# Altium PCB PCB1.PcbDoc
Units mil, origin at the board's own origin, x right, y up, seen from the top; angles counter-clockwise.
Board outline 4000 x 4000 mil, 2 copper layers (Top Layer, Bottom Layer); 49 components, 31 nets, 140 pads, 0 vias.
Unrouted connection lines stored in the file: 37.
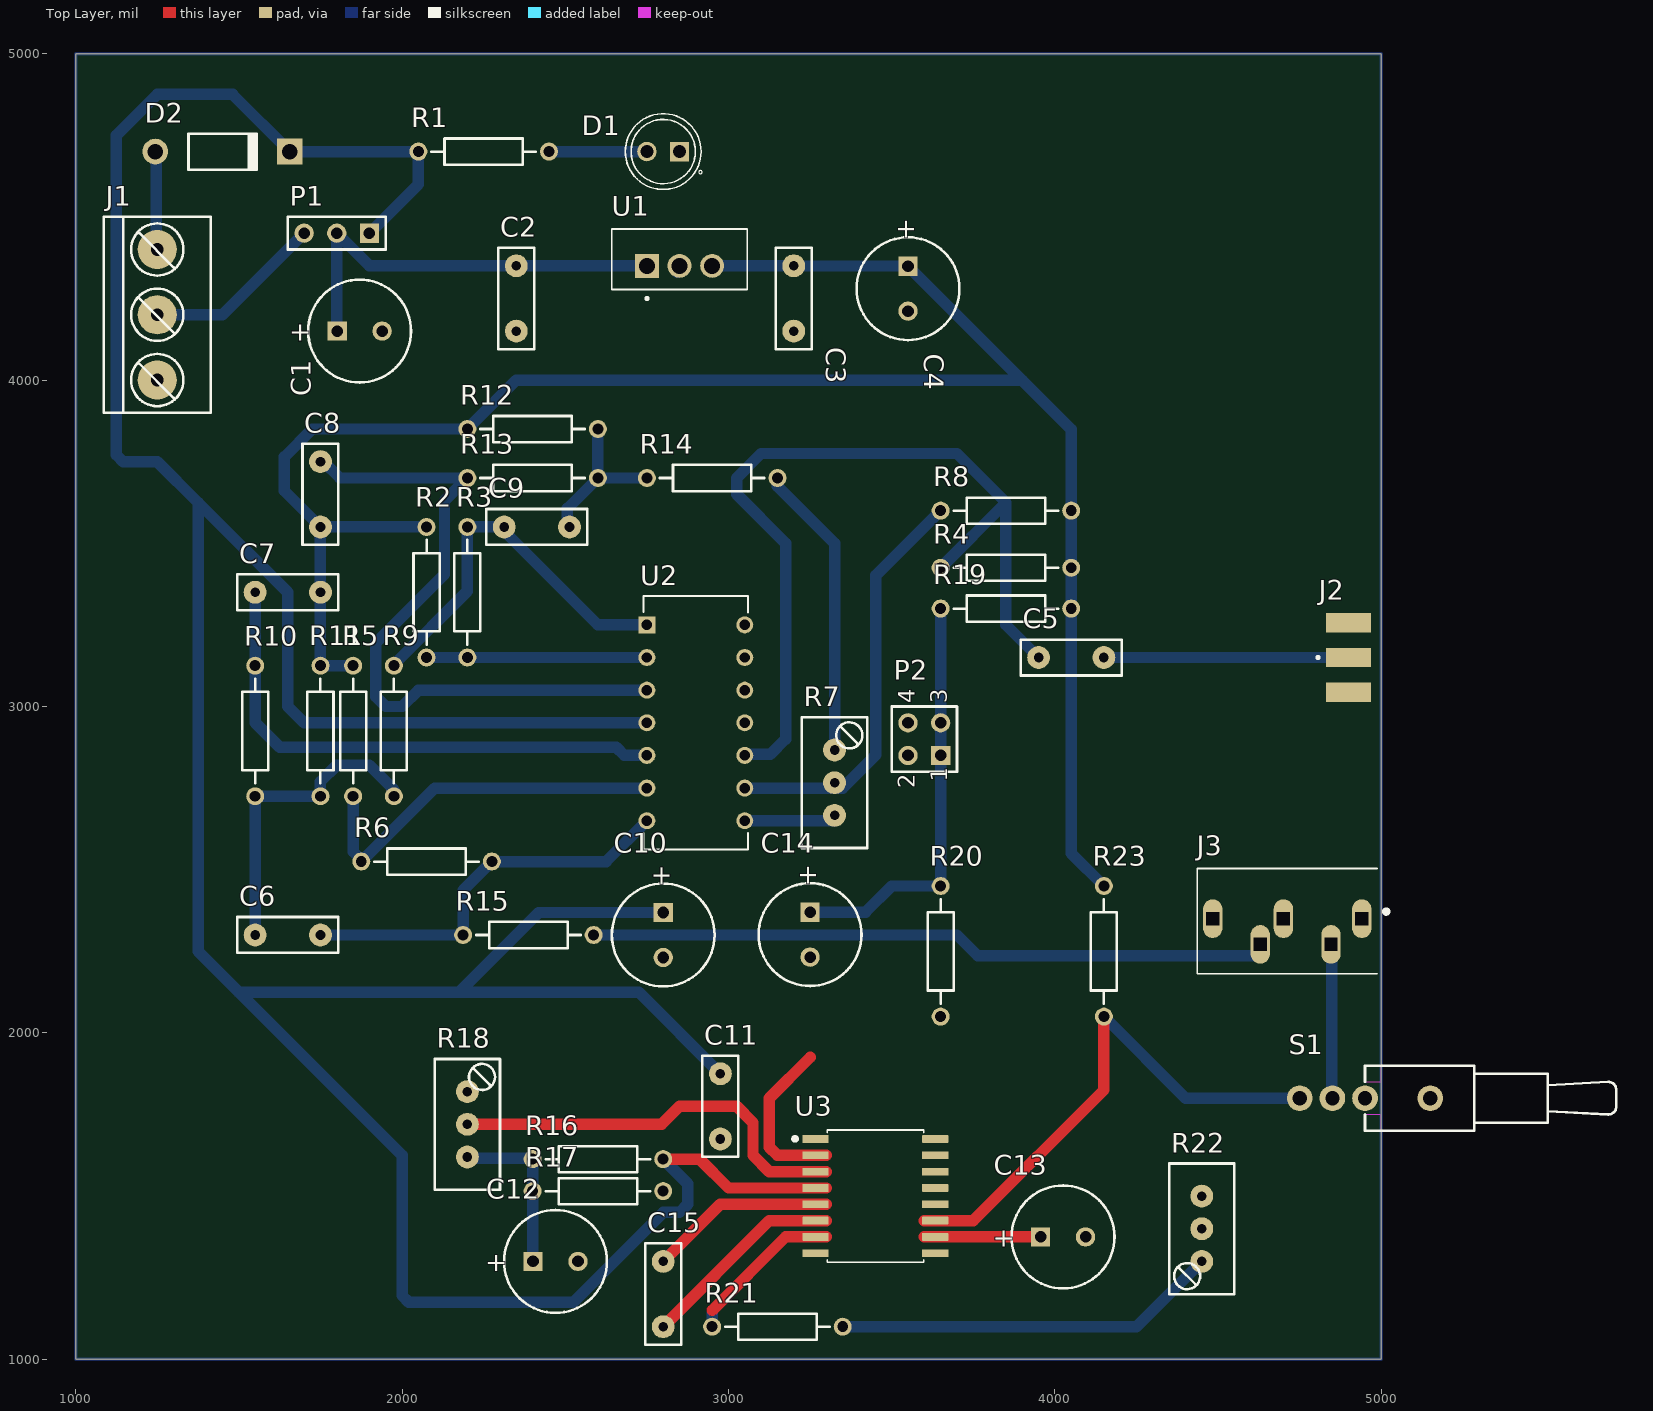
[diagram p0: Top Layer view]
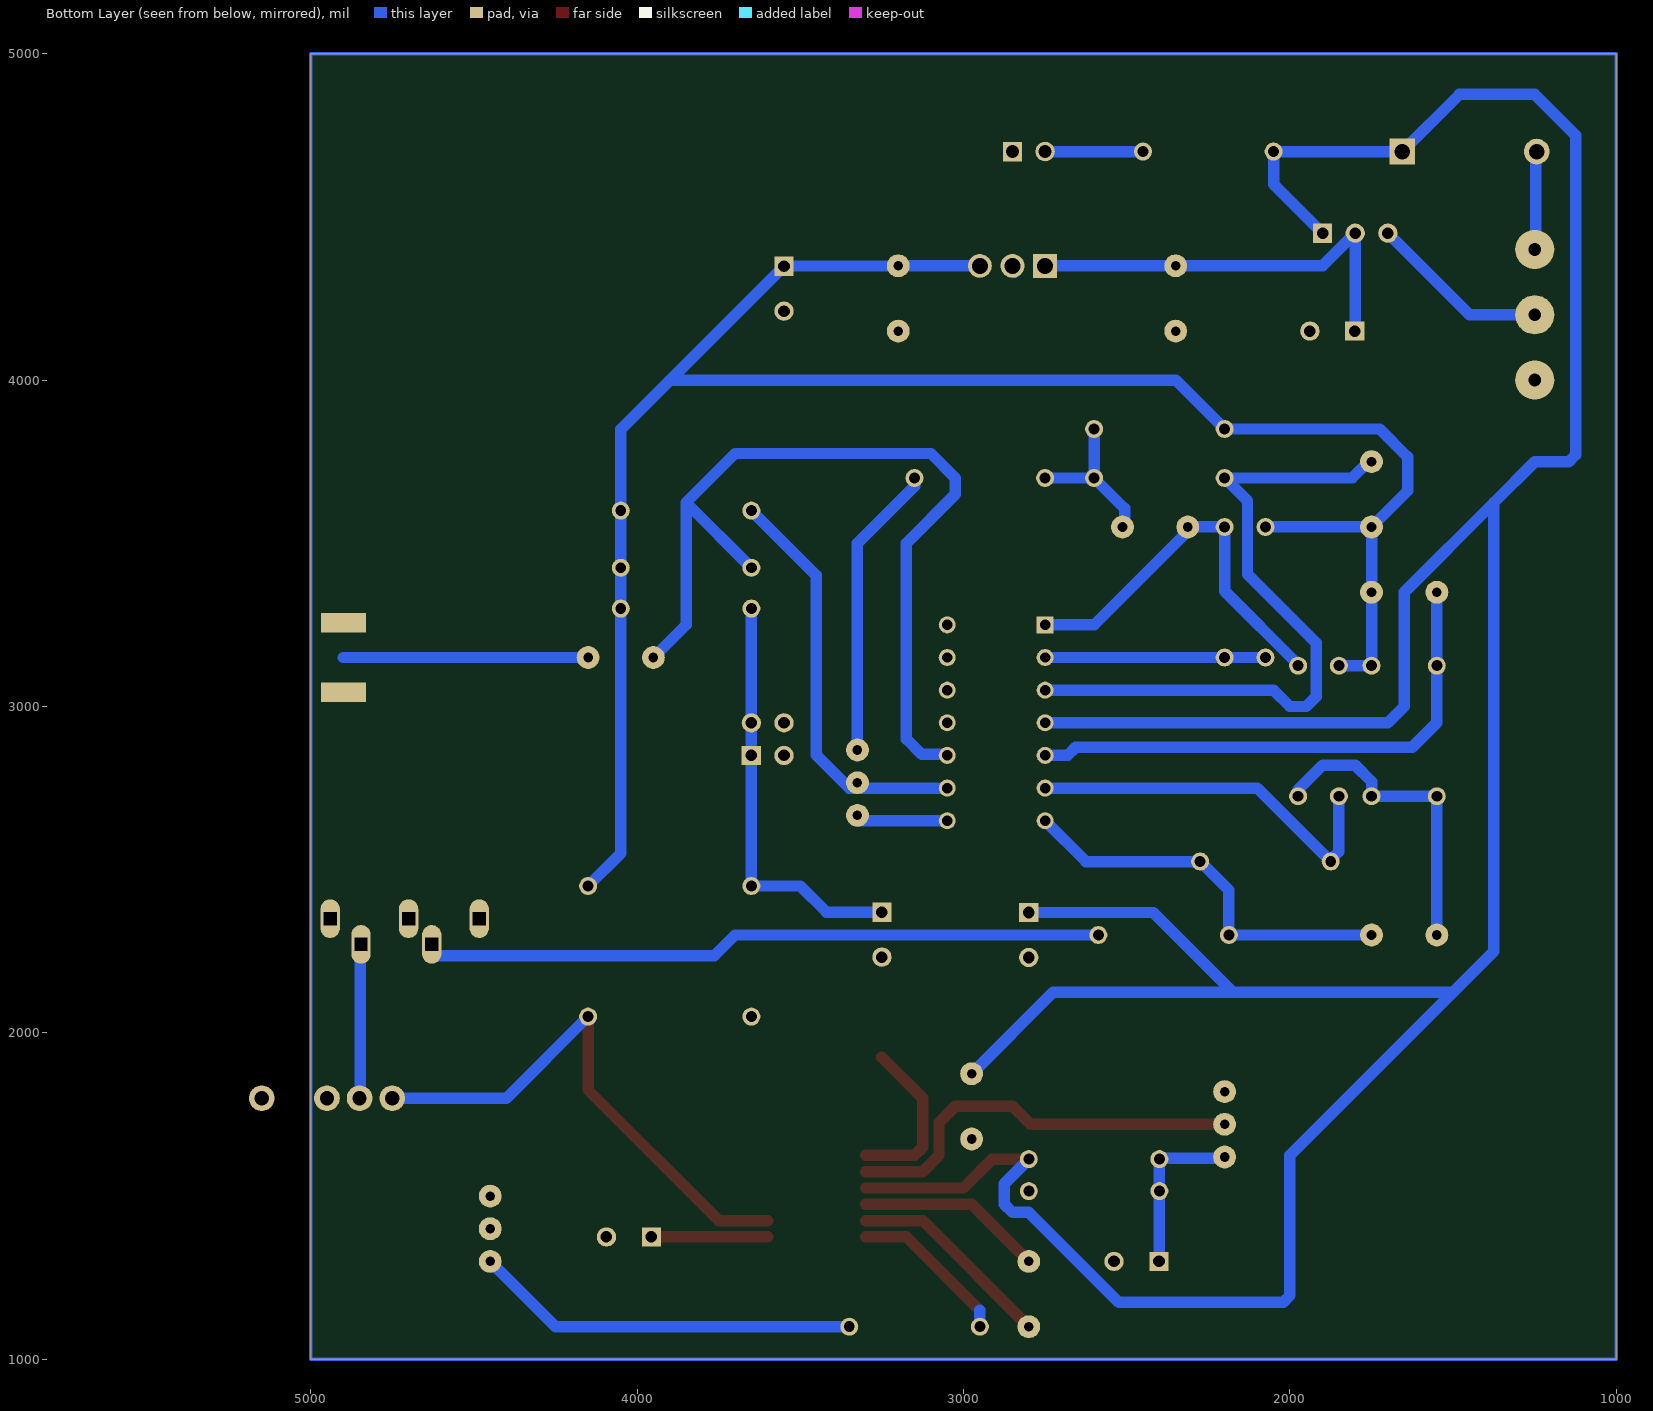
[diagram p1: Bottom Layer view, seen from below]

## Layer stack, top to bottom
Top Solder: solder mask 0.4, Solder Resist, Dk 3.5
Top Layer: signal copper 1.4
Dielectric 1: dielectric 12.6, FR-4, Dk 4.8
Bottom Layer: signal copper 1.4
Bottom Solder: solder mask 0.4, Solder Resist, Dk 3.5

## Board outline
1000,1000 5000,1000 5000,5000 1000,5000

## Design rules (kind name [scope] priority, off if disabled: settings)
Clearance [All] p1: gap=10 ignorepadtopadclearanceinfootprint=FALSE except(0: Arc-Hole Track-Hole SMDPad-Hole THPad-Hole Via-Hole Fill-Hole Poly-Hole Region-Hole Text-Hole)
PolygonConnect [All] p1: connectstyle=Relief reliefconductorwidth=10 reliefentries=4 polygonreliefangle="90 Angle" airgapwidth=10
RoutingVias [All] p1: holewidth=28 width=50 viastyle="Through Hole" minholewidth=28 minwidth=50 maxholewidth=28 maxwidth=50
SolderMaskExpansion [All] p1: expansion=4
UnRoutedNet [All] p1: checkbadconnections=TRUE
Width [All] p1: maxlimit=50 minlimit=20 preferedwidth=35
29 further rules are at their usual default settings.

## Components (designator, comment, footprint, x,y, rotation, side; value= is the part's Value field where it differs from the comment)
C1 "Cap2" CAPPR3.5-8x11.5 1870,4150 r0 top value=10uF
C2 "Cap" RAD-0.2 2350,4350 r270 top value=100nF
C3 "Cap" RAD-0.2 3200,4350 r270 top value=10nF
C4 "Cap2" CAPPR3.5-8x11.5 3550,4280 r270 top value=1uF
C5 "Cap" RAD-0.2 3950,3150 r0 top value=1uF
C6 "Cap" RAD-0.2 1750,2300 r180 top value=1nF
C7 "Cap" RAD-0.2 1550,3350 r0 top value=1nF
C8 "Cap" RAD-0.2 1750,3550 r90 top value=1nF
C9 "Cap" RAD-0.2 2512.88,3550 r180 top value=1nF
C10 "Cap2" CAPPR3.5-8x11.5 2800,2300 r270 top value=100uF
C11 "Cap" RAD-0.2 2975,1875 r270 top value=0.1uF
C12 "Cap2" CAPPR3.5-8x11.5 2470,1300 r0 top value=10uF
C13 "Cap2" CAPPR3.5-8x11.5 4025,1375 r0 top value=1uF
C14 "Cap2" CAPPR3.5-8x11.5 3250,2301.1 r270 top value=10uF
C15 "Cap" RAD-0.2 2800,1300 r270 top value=0.47uF
D1 "WP7113SEC" LED_WP7113SEC 2800,4700 r180 top
D2 "1N4001" DO-41 1450,4700 r0 top
J1 "Borne x 3" BORNE-3x0.2 1250,4200 r270 top
J2 "SMA" RFSOLUTIONS_CON-SMA-EDGE-S 4900,3150 r180 top
J3 "SJ1-3535N" CUI_SJ1-3535N 4940.16,2350 r180 top
P1 "Header 3" HDR1X3 1900,4450 r180 top
P2 "Header 2X2" HDR2X2 3650,2850 r90 top
R1 "Res2" AXIAL-0.4 2250,4700 r180 top value=1K
R2 "Res2" AXIAL-0.4 2075,3350 r270 top value=12K
R3 "Res2" AXIAL-0.4 2200,3350 r90 top value=1K
R4 "Res2" AXIAL-0.4 3850,3425 r0 top value=10K
R5 "Res2" AXIAL-0.4 1850,2925 r270 top value=1.5K
R6 "Res2" AXIAL-0.4 2075,2525 r0 top value=1K
R7 "RPot" TRIMMER-V 3325,2766.51 r270 top value=10K
R8 "Res2" AXIAL-0.4 3850,3600 r180 top value=220
R9 "Res2" AXIAL-0.4 1975,2925 r270 top value=18K
R10 "Res2" AXIAL-0.4 1550,2925 r90 top value=3.9K
R11 "Res2" AXIAL-0.4 1750,2925 r270 top value=27K
R12 "Res2" AXIAL-0.4 2400,3850 r180 top value=100K
R13 "Res2" AXIAL-0.4 2400,3700 r180 top value=6.8K
R14 "Res2" AXIAL-0.4 2950,3700 r0 top value=8.2K
R15 "Res2" AXIAL-0.4 2386.97,2300 r0 top value=47K
R16 "Res2" AXIAL-0.4 2600,1613.25 r180 top value=5.1K
R17 "Res2" AXIAL-0.4 2600,1515.36 r0 top value=5.1K
R18 "RPot" TRIMMER-V 2200,1720 r270 top value=50K
R19 "Res2" AXIAL-0.4 3850,3300 r0 top value=100K
R20 "Res2" AXIAL-0.4 3650,2250 r90 top value=100K
R21 "Res2" AXIAL-0.4 3150,1100 r180 top value=1K
R22 "RPot" TRIMMER-V 4450,1400 r90 top value=2M
R23 "Res2" AXIAL-0.4 4150,2250 r270 top value=10K
S1 "SW-SPDT" TL36WW15050 4950,1800 r0 top
U1 "LM2940CT-5.0" TO254P1054X470X1955-3 2850,4350 r0 top
U2 "MAX414CPD" 21-0043D_14 3050,2650 r0 top
U3 "XR2206/11/12EB" SOIC127P1032X265-16N 3450,1500 r0 top

## Footprints (in the part's own frame and the unit in brackets; to place one, negate y for a bottom-side part, rotate by r counter-clockwise, add the part's x,y. Pads: shape width x height; smd on the part's side, far side on the other; paste and mask are expansions set on the pad)
21-0043D_14 [mil]
  rect 52x52 hole 32: 1(-300,600)
  round 52 hole 32: 2(-300,500) 3(-300,400) 4(-300,300) 5(-300,200) 6(-300,100) 7(-300,0) 8(0,0) 9(0,100) 10(0,200) 11(0,300) 12(0,400) 13(0,500) 14(0,600)
  silkscreen extent -310,-88 10,688
AXIAL-0.4 [mm] "Axial Device, Thru-Hole; 2 Leads; 0.4 in Pin Spacing"
  round 1.4 hole 0.85: 1(-5.08,0) 2(5.08,0)
  silkscreen extent -4.06,-1.02 4.06,1.02
BORNE-3x0.2 [mil] "Triple borne para circuito impreso a tornillo, Pitch: 200mil (5.08mm), Largo cuerpo: 327mil (8.3mm)"
  round 120 hole 39.37: 1(-200,0) 2(0,0) 3(200,0)
  silkscreen extent -300,-164 300,164
CAPPR3.5-8x11.5 [mm] "Capacitor, Electrolytic, Radial; Body 8 x 11.5 mm (Dia.xH typ); Pin Spacing 3.5 mm (typ)"
  rect 1.5x1.5 hole 0.9: 1(-1.75,0)
  round 1.5 hole 0.9: 2(1.75,0)
  silkscreen extent -4,-4 4,4
CUI_SJ1-3535N [mm]
  oval 1.508x3.016 hole 1 square: 1(0,0) 2(2.4,2) 3(7.9,2) 4(11.6,0) 5(6.1,0)
  silkscreen extent -2.05,-3.9 12.8,4.3
DO-41 [mm] "Diode, Axial; Body 5.2 x 2.7 mm (LxDia. max), Lead Dia. 0.86 mm (max)"
  round 2 hole 1.2: 1(-5.23,0)
  rect 2x2 hole 1.2: 2(5.23,0)
  silkscreen extent -2.65,-1.4 2.75,1.4
HDR1X3 [mm] "Connector; Header; 3 Position"
  rect 1.5x1.5 hole 0.9: 1(0,0)
  round 1.5 hole 0.9: 2(2.54,0) 3(5.08,0)
  silkscreen extent -1.27,-1.27 6.35,1.27
HDR2X2 [mm] "Connector; Header; 2x2 Position"
  rect 1.5x1.5 hole 0.9: 1(0,0)
  round 1.5 hole 0.9: 2(0,2.54) 3(2.54,0) 4(2.54,2.54)
  silkscreen extent -1.27,-1.27 3.81,3.81
LED_WP7113SEC [mm]
  round 1.508 hole 1: A(1.27,0)
  rect 1.508x1.508 hole 1: C(-1.27,0)
  silkscreen extent -3.03,-2.95 2.95,2.95
RAD-0.2 [mil] "Componente de 2 pines radiales, Pitch: 200mil (5.08mm)"
  round 70 hole 29.53: 1(0,0) 2(200,0)
  silkscreen extent -55,-55 255,55
RFSOLUTIONS_CON-SMA-EDGE-S [mm]
  rect 3.5x1.5 smd: 1(0,0) G1(0,2.7) G2(0,-2.7)
  rect 3.5x1.5 smd far side: G3(0,2.7) G4(0,-2.7)
  silkscreen extent 2.3,-0.1 2.5,0.1
SOIC127P1032X265-16N [mm]
  rrect15% 2.05x0.6 smd: 1(-4.655,4.445) 2(-4.655,3.175) 3(-4.655,1.905) 4(-4.655,0.635) 5(-4.655,-0.635) 6(-4.655,-1.905) 7(-4.655,-3.175) 8(-4.655,-4.445) 9(4.655,-4.445) 10(4.655,-3.175) 11(4.655,-1.905) 12(4.655,-0.635) 13(4.655,0.635) 14(4.655,1.905) 15(4.655,3.175) 16(4.655,4.445)
  silkscreen extent -6.4,-5.15 3.75,5.15
TL36WW15050 [mm] "Switch; 4 Leads"
  round 2 hole 1.1: 1(0,0) 2(-2.54,0) 3(-5.08,0) M(5.08,0)
  Top Layer keep-out region: 0,-1.27 0,-2.54 1.27,-2.54 1.27,-1.27
  Top Layer keep-out region: 0,2.54 0,1.27 1.27,1.27 1.27,2.54
  Top Layer keep-out region: 1.27,2.54 1.27,-2.54 8.509,-2.54 8.509,2.54
  silkscreen extent 0,-2.54 19.56,2.54
TO254P1054X470X1955-3 [mm]
  rect 1.86x1.86 hole 1.24: 1(-2.54,0)
  round 1.86 hole 1.24: 2(0,0) 3(2.54,0)
  silkscreen extent -5.27,-2.64 5.27,2.86
TRIMMER-V [mil] "Ajuste vertical, Largo: 400mil (10.16mm), Ancho: 200mil (5.08mm)"
  round 70 hole 29.53: 1(-100,0) 2(0,0) 3(100,0)
  silkscreen extent -200,-100 200,100

## Part data
C1 C2 C3 C4 C5 C6 C7 C8 C9 C10 C11 C12 C13 C14 C15: "Capacitor", Publisher="Altium Limited"
  C1 C4 C10 C12 C13 C14: PackageDescription="Capacitor; 2 Leads", PackageReference=CAPPR3.5-8x11.5, Published=23-Sep-2002
  C2 C3 C5 C6 C7 C8 C9 C11 C15: LatestRevisionDate=17-Jul-2002, LatestRevisionNote="Re-released for DXP Platform.", PackageDescription="Radial Cap, Thru-Hole; 2 Leads; 0.3 in Pin Spacing", PackageReference=RAD-0.2, Published=8-Jun-2000
D1: "Red 625nm LED Indication - Discrete 2.2V Radial", Package="Radial Kingbright", Arrow_Electronics-Purchase-URL=https://snapeda.com/shop?store=Arrow+Electronics&id=1233302, Availability=Good, DigiKey-Purchase-URL=https://snapeda.com/shop?store=DigiKey&id=1233302, MF=Kingbright, Mouser-Purchase-URL=https://snapeda.com/shop?store=Mouser&id=1233302, MP=WP7113SEC, Price=None, SnapEDA_Link=https://www.snapeda.com/parts/WP7113SEC/Kingbright/view-part/1233302/?ref=snap
D2: library part "Diode 1N4001", "1 Amp General Purpose Rectifier", Code_JEDEC=DO-204-AL, ComponentLink1Description="Manufacturer Link", ComponentLink1URL=http://www.fairchildsemi.com/, ComponentLink2Description=Datasheet, ComponentLink2URL=http://www.fairchildsemi.com/ds/1N%2F1N4001.pdf, DatasheetVersion=1998, LatestRevisionDate=17-Jul-2002, LatestRevisionNote="Re-released for DXP Platform.", PackageDescription="Diode, Axial; Body 5.2 x 2.7 mm (LxDia. max), Lead Dia. 0.86 mm (max)", PackageReference=DO-41, PackageVersion=Aug-1999, Published=8-Jun-2000, Publisher="Altium Limited"
J1: "Triple borne para circuito impreso", Función 1=1, Función 2=2, Función 3=3
J2: library part CON-SMA-EDGE-S, "SMA Connector Jack, Female Socket Board Edge, End Launch Solder", Package=None, Availability=Unavailable, DigiKey-Purchase-URL=https://snapeda.com/shop?store=DigiKey&id=557794, MF="RF Solutions", Mouser-Purchase-URL=https://snapeda.com/shop?store=Mouser&id=557794, MP=CON-SMA-EDGE-S, Price=None, SnapEDA_Link=https://www.snapeda.com/parts/CON-SMA-EDGE-S/RF%20Solutions/view-part/557794/?ref=snap
J3: "3.5 mm, Stereo, Right Angle, Through Hole, Audio Jack Connector", Package=None, Availability=Unavailable, CUI_purchase_URL=https://www.cuidevices.com/product/interconnect/connectors/audio-connectors/jacks/sj1-353xn-series?utm_source=snapeda.com&utm_medium=referral&utm_campaign=snapedaBOM, MF="CUI Devices", MP=SJ1-3535N, Price=None, SnapEDA_Link=https://www.snapeda.com/parts/SJ1-3535N/CUI%20Devices/view-part/533084/?ref=snap
P1: "Header, 3-Pin", LatestRevisionDate=17-Jul-2002, LatestRevisionNote="Re-released for DXP Platform.", Publisher="Altium Limited"
P2: "Header, 2-Pin, Dual row", LatestRevisionDate=17-Jul-2002, LatestRevisionNote="Re-released for DXP Platform.", Publisher="Altium Limited"
R1 R2 R3 R4 R5 R6 R8 R9 R10 R11 R12 R13 R14 R15 R16 R17 R19 R20 R21 R23: "Resistor", LatestRevisionDate=17-Jul-2002, LatestRevisionNote="Re-released for DXP Platform.", PackageDescription="Axial Device, Thru-Hole; 2 Leads; 0.4 in Pin Spacing", PackageReference=AXIAL-0.4, Published=8-Jun-2000, Publisher="Altium Limited"
R7 R18 R22: "Potentiometer", LatestRevisionDate=17-Jul-2002, LatestRevisionNote="Re-released for DXP Platform.", PackageDescription="Variable Resistor, Thru-Hole; 3 Leads", PackageReference=VR5, Published=8-Jun-2000, Publisher="Altium Limited", Set Position=0.5, Sim Note="Enter the Resistance value and the set point into parameter fields."
S1: "SPDT Subminiature Toggle Switch, Right Angle Mounting, Vertical Actuation", ComponentLink1Description="Manufacturer Link", ComponentLink1URL=http://www.apem.com, DatasheetVersion=05-Dec-2000, LatestRevisionDate=17-Dec-2003, LatestRevisionNote="Schematic revised, PCB Footprint replaced.", PackageDescription="Switch; 4 Leads", PackageReference=TL36WW15050, Published=24-Mar-1999, Publisher="Altium Limited"
U1: "1-A, 26-V, high-PSRR, low-dropout voltage regulator 3-TO-220 0 to 125", Package="TO-220-3 Texas Instruments", Availability=Warning, BuyPart=https://www.snapeda.com/parts/LM2940CT-5.0/Texas%20Instruments/view-part/213981/?ref=eda, DigiKey-Purchase-URL=https://snapeda.com/shop?store=DigiKey&id=213981, MF="Texas Instruments", Mouser-Purchase-URL=https://snapeda.com/shop?store=Mouser&id=213981, MP=LM2940CT-5.0, Price=None, SnapEDA_Link=https://www.snapeda.com/parts/LM2940CT-5.0/Texas%20Instruments/view-part/213981/?ref=snap
U2: Package=None, Availability=Unavailable, MP=MAX414CPD, Price=None
U3: "XR2206, XR2211, XR2212 Multi-Purpose Timing Evaluation Board", Package="TSSOP-20 Exar", Digi-Key_Part_Number=1016-1428-ND, Digi-Key_Purchase_URL=https://www.digikey.com/product-detail/en/maxlinear-inc/XR2206-11-12EB/1016-1428-ND/2636661?utm_source=snapeda&utm_medium=aggregator&utm_campaign=symbol, MF="MaxLinear, Inc.", MP=XR2206/11/12EB, SnapEDA_Link=https://www.snapeda.com/parts/XR2206/11/12EB/MaxLinear%2C%20Inc./view-part/230277/?ref=snap

## Nets (pads, with @x,y where several pads share a name; then routed paths per layer and width w, separated by ;. In a path a pad name is that pad's centre, name@x,y a point inside that pad or via, vN(x,y) a via of type N, cw(c..) or ccw(c..) an arc to the next point about the centre after c; other vN are vias at no path point)
+5: C3.1 C4.1 C7.2 C8.1 R2.1 R4.2 R5.1 R8.1 R11.1 R12.2 R19.2 R23.1 U1.3 | length 6215.4
  Bottom Layer w35: R5.1 R11.1 C7.2 C8.1 ; R2.1 C8.1 ; U1.3 C3.1 3200.55,4349.45 3549.45,4349.45 C4.1 3899.45,3999.45 ; R23.1 4050,2550 R19.2 4050,3450 R8.1 4050,3848.9 3899.45,3999.45 ; C8.1 1639.5,3660.5 1639.5,3764.5 1725,3850 R12.2 2349.45,3999.45 3899.45,3999.45
+12: C10.1 C11.1 D2.2 P1.1 R1.2 R16.1 U2.4 U3.4 | length 11217.4
  Top Layer w35: R16.1 2911.75,1613.25 3000,1525 U3.4@3300,1525
  Bottom Layer w35: P1.1 2050,4600 R1.2 D2.2 1480.91,4875 1250,4875 1125,4750 1125,3770.5 1145.5,3750 1250,3750 1375,3625 ; U2.4 1700,2950 1650,3000 1650,3350 1375,3625 ; R16.1 2875,1538.25 2875,1475 2850,1450 2800,1450 2525,1175 2020.5,1175 2000,1195.5 2000,1625 1500,2125 ; C10.1 2418.9,2368.9 2175,2125 ; C11.1 2725,2125 2175,2125 ; 1375,3625 1375,2250 1500,2125 ; 1500,2125 2175,2125
GND: C1.2 C2.2 C3.2 C4.2 C10.2 C11.2 C12.2 C13.2 D1.C J1.3 J2.G1 J2.G2 J2.G3 J2.G4 J3.1 P2.2 P2.4 R17.2 R20.1 R22.2 R22.3 S1.1 U1.2 U2.11 U2.12 U2.13 U3.1 U3.9 U3.12 U3.13 U3.14 U3.15 U3.16 | length 22.5
  Bottom Layer w35: U1.2@2842.69,4330.57 2842.69,4342.69 U1.2
NetC1_2: C1.1 C2.1 P1.2 U1.1 | length 1291.1
  Bottom Layer w35: P1.2 P1.2@1800.55,4449.45 ; C1.1 1800.55,4150.55 P1.2@1800.55,4449.45 ; U1.1 C2.1 1900,4350 P1.2@1800.55,4449.45
NetC5_1: C5.1 R4.1 U2.10 | length 2725.3
  Bottom Layer w35: U2.10 3053.25,2853.25 3128.25,2853.25 3175,2900 3175,3500 3025,3650 3025,3700 3100,3775 3700,3775 3850,3625 ; R4.1 3850,3625 ; C5.1 3850,3250 3850,3625
NetC5_2: C5.2 J2.1 | length 750
  Bottom Layer w35: C5.2 4900,3150
NetC6_1: C6.1 R6.2 R15.1 U2.7 | length 1225.2
  Bottom Layer w35: C6.1 R15.1 2186.97,2436.97 R6.2 2625,2525 U2.7
NetC6_2: C6.2 R9.2 R10.1 R11.2 | length 968.9
  Bottom Layer w35: C6.2 R10.1 R11.2 1750,2770 1800,2820 1900,2820 1975,2745 R9.2 R9.2@1977.12,2725
NetC7_1: C7.1 R10.2 U2.5 | length 1641.4
  Bottom Layer w35: C7.1 R10.2 1550,2950 1625,2875 2656.25,2875 2681.25,2850 U2.5
NetC8_2: C8.2 R13.2 U2.3 | length 2119.9
  Bottom Layer w35: C8.2 1759.47,3750 1809.47,3700 R13.2 2130.06,3630.06 2130.06,3405.06 1919.94,3194.94 1919.94,3030.06 1950,3000 2000,3000 2050,3050 U2.3
NetC9_1: C9.1 R12.1 R13.1 R14.1 | length 491.4
  Bottom Layer w35: C9.1@2500,3550 2506.7,3556.7 2506.7,3606.7 R13.1 ; R12.1 R13.1 ; R14.1 R13.1
NetC9_2: C9.2 R3.2 R9.1 U2.1 | length 1191.6
  Bottom Layer w35: R9.1@1977.12,3125 1977.12,3129.98 2200,3352.87 R3.2 2300,3550 2600,3250 U2.1
NetC12_2: C12.1 R16.2 R17.1 R18.1 R18.3 | length 516.5
  Bottom Layer w35: R18.3 2203.38,1616.62 2396.62,1616.62 R16.2 R17.1 2400.55,1514.81 2400.55,1300.55 C12.1
NetC13_2: C13.1 U3.10 | length 356.1
  Top Layer w35: U3.10@3600,1375 C13.1
NetC14_1: C14.2 U3.2 | length 512.1
  Top Layer w35: 3250,1925 3125,1800 3125,1650 3150,1625 U3.2@3300,1625
NetC14_2: C14.1 P2.1 P2.3 R19.1 R20.2 | length 1283.1
  Bottom Layer w35: C14.1 3420,2370 3500,2450 R20.2 P2.1 P2.3 R19.1
NetC15_1: C15.1 U3.5 | length 572.5
  Top Layer w35: C15.1 2975,1475 U3.5@3300,1475
NetC15_2: C15.2 U3.6 | length 634.6
  Top Layer w35: C15.2 3125,1425 U3.6@3300,1425
NetD1_A: D1.A R1.1 | length 300
  Bottom Layer w35: R1.1 D1.A
NetD2_1: D2.1 J1.1 | length 302.4
  Bottom Layer w35: D2.1 1247.05,4697.05 1247.05,4402.95 J1.1
NetJ1_2: J1.2 P1.3 | length 553.6
  Bottom Layer w35: J1.2 1450,4200 P1.3
NetJ3_2: J3.2 S1.2 | length 473.1
  Bottom Layer w35: J3.2 4847.84,2269.09 4847.84,1802.16 S1.2
NetJ3_3: J3.3 R15.2 | length 2096
  Bottom Layer w35: R15.2 3700,2300 3763.09,2236.91 4617.88,2236.91 4629.13,2248.17 J3.3
NetR2_2: R2.2 R3.1 U2.2 | length 652.1
  Bottom Layer w35: R2.2@2077.12,3150 R3.1@2175,3150 ; R3.1@2195.77,3150 U2.2
NetR5_2: R5.2 R6.1 U2.6 | length 1178.6
  Bottom Layer w35: R5.2 1850,2555.44 1875,2530.44 R6.1 2100,2750 U2.6
NetR7_1: R7.1 R7.3 R14.2 U2.8 | length 1197.5
  Bottom Layer w35: U2.8 R7.3@3325,2650 ; R14.2 3150,3675 3325,3500 R7.1@3325,2850
NetR7_2: R7.2 R8.2 U2.9 | length 1274.3
  Bottom Layer w35: U2.9 3250,2750 3350,2750 3451.42,2851.42 3451.42,3401.42 R8.2
NetR18_2: R18.2 U3.3 | length 1264.2
  Top Layer w35: R18.2 2795,1720 2850,1775 3025,1775 3075,1725 3075,1625 3125,1575 U3.3@3300,1575
NetR21_1: R21.1 R22.1 | length 1182.8
  Bottom Layer w35: R21.1 4250,1100 R22.1
NetR21_2: R21.2 U3.7 | length 493.2
  Top Layer w35: 2950,1150 3175,1375 U3.7@3300,1375
  Bottom Layer w35: R21.2 2950,1150
NetR23_2: R23.2 S1.3 U3.11 | length 1644.2
  Top Layer w35: U3.11@3600,1425 3750,1425 4150,1825 R23.2
  Bottom Layer w35: R23.2 4400,1800 S1.3
pads on no net: J3.4 J3.5 S1.M U2.14 U3.8
copper on no net: | length 16000
  Bottom Layer w10: 1000,1000 5000,1000 5000,5000 1000,5000 1000,1000

## Polygon pours and split planes (outlines as drawn)
GND on Bottom Layer "GND" (solid, pour order 4): 4950,4950
GND on Bottom Layer "GND" (solid, pour order 2): 1050,4940

## Text inside footprints (layer, text, board x,y; h text height)
C1: Top Overlay "+" at 1654.45,4120.47 h59.06
C4: Top Overlay "+" at 3520.47,4495.55 h59.06 r270
C10: Top Overlay "+" at 2770.47,2515.55 h59.06 r270
C12: Top Overlay "+" at 2254.45,1270.47 h59.06
C13: Top Overlay "+" at 3809.45,1345.47 h59.06
C14: Top Overlay "+" at 3220.47,2516.65 h59.06 r270
P2: Top Overlay "1" at 3670,2770 h50 r90; Top Overlay "2" at 3570,2750 h50 r90; Top Overlay "4" at 3570,3010 h50 r90; Top Overlay "3" at 3670,3010 h50 r90